# Altium PCB SPI-光电.PCBDOC
Units mm, origin at the board's own origin, x right, y up, seen from the top; angles counter-clockwise.
Board outline 85.45 x 30.8 mm, 2 copper layers (Top Layer, Bottom Layer); 28 components, 14 nets, 71 pads, 34 vias.
Unrouted connection lines stored in the file: 5.
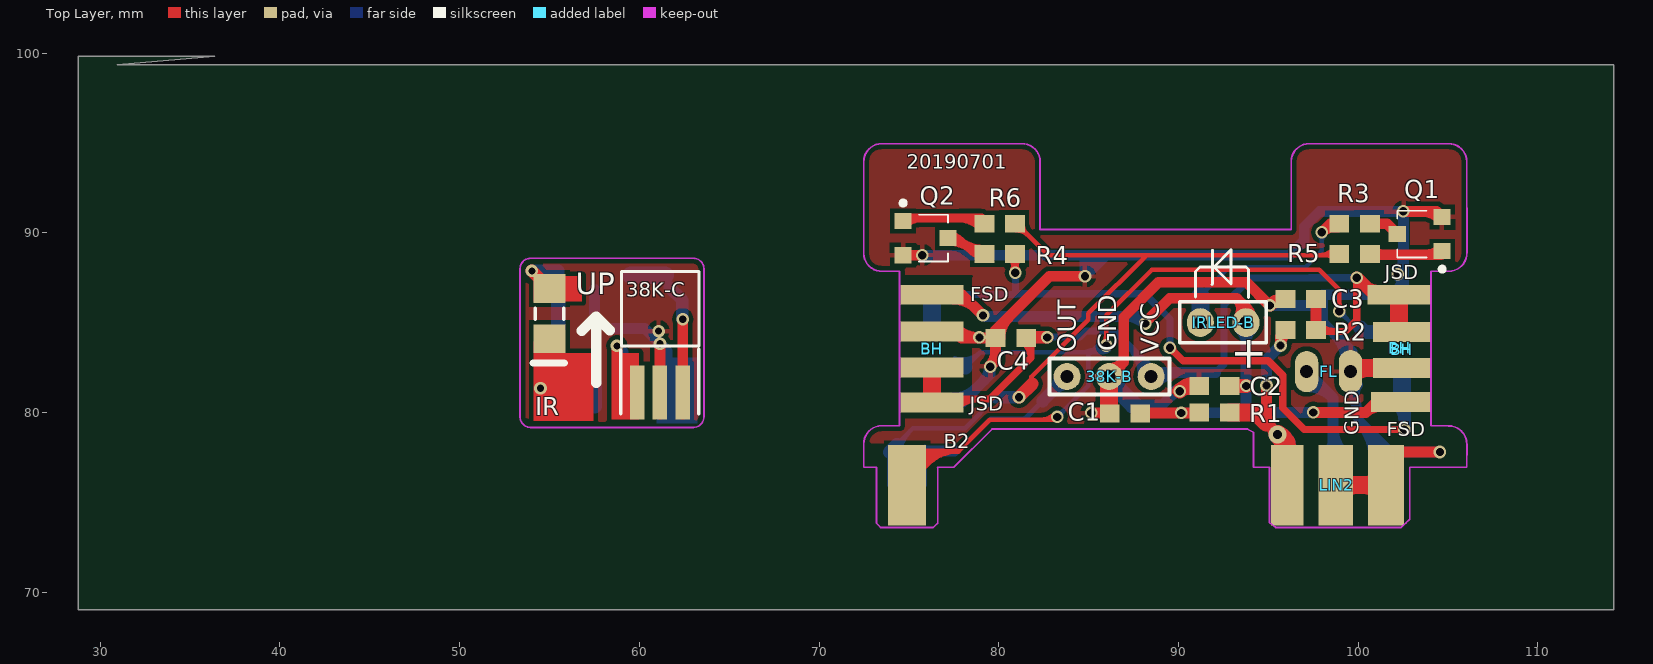
[diagram p0: Top Layer view]
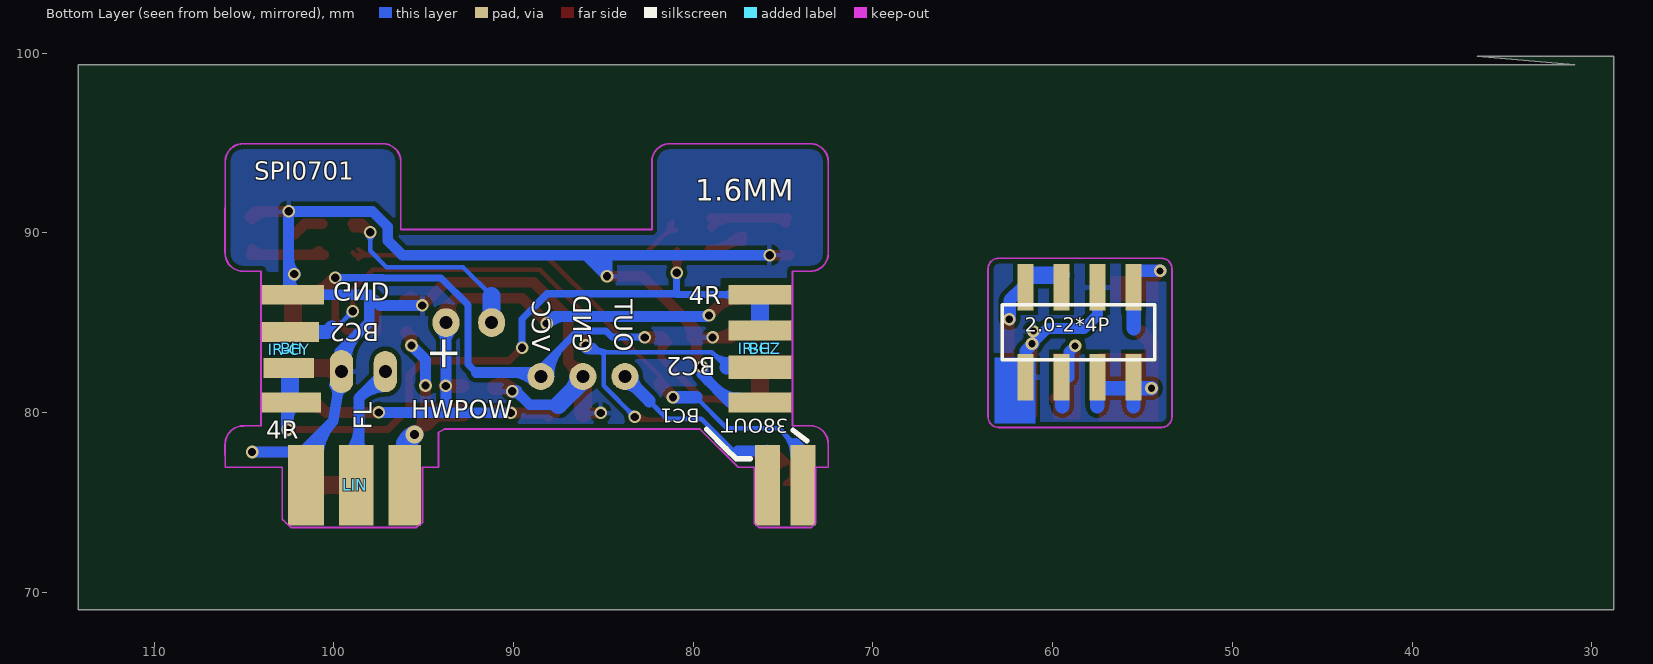
[diagram p1: Bottom Layer view, seen from below]

## Layer stack, top to bottom
Top Layer: signal copper 0.0356
Dielectric: dielectric 0.32, FR-4, Dk 4.8
Bottom Layer: signal copper 0.0356

## Board outline
30.95,99.35 114.225,99.35 114.225,69.025 28.775,69.025 28.775,99.825 36.375,99.825

## Design rules (kind name [scope] priority, off if disabled: settings)
Clearance [All] p1: gap=0.254
FabricationTestPointUsage TestPointUsage [All] p1: valid=0 allowmultiple=FALSE
FabricationTestpoint Testpoint [All] p1: side=3 testpointundercomponent=TRUE minsize=1.016 maxsize=2.54 preferedsize=1.524 minholesize=0 maxholesize=1.016 preferedholesize=0.813 testpointgrid=0.025 allowsidetop=TRUE allowsidebottom=TRUE usegrid=TRUE gridtolerance=0
PolygonConnect [All] p1: connectstyle=Relief reliefconductorwidth=0.254 reliefentries=4 polygonreliefangle="90 Angle"
RoutingVias [All] p1: holewidth=0.46 width=0.7 viastyle="Through Hole" minholewidth=0.4 minwidth=0.7 maxholewidth=1 maxwidth=2
SilkscreenOverComponentPads [All] p1: minsilkscreentomaskgap=0.254
SolderMaskExpansion [All] p1: expansion=0.102
Width Width_6 [InNet('Net1C_1')] p1: maxlimit=1 minlimit=0.254 preferedwidth=0.6 minimp=50.000000 maximp=50.000000 favimp=50.000000
Width Width_5 [InNet('FL')] p2: maxlimit=1 minlimit=0.254 preferedwidth=0.6 minimp=50.000000 maximp=50.000000 favimp=50.000000
Width Width_4 [InNet('GND')] p3: maxlimit=2 minlimit=0.254 preferedwidth=0.6 minimp=50.000000 maximp=50.000000 favimp=50.000000
Width Width_3 [InNet('5V')] p4: maxlimit=1 minlimit=0.254 preferedwidth=0.6 toplayer_prefwidth=0.4 minimp=50.000000 maximp=50.000000 favimp=50.000000
Width Width_2 [InNet('3V3')] p5: maxlimit=1 minlimit=0.254 preferedwidth=0.6 minimp=50.000000 maximp=50.000000 favimp=50.000000
Width Width_1 [InNet('3.3V')] p6: maxlimit=1 minlimit=0.254 preferedwidth=0.6 minimp=50.000000 maximp=50.000000 favimp=50.000000
Width [All] p7: maxlimit=1 minlimit=0.254 preferedwidth=0.254 minimp=50.000000 maximp=50.000000 favimp=50.000000
25 further rules are at their usual default settings.

## Components (designator, comment, footprint, x,y, rotation, side; value= is the part's Value field where it differs from the comment)
2.0-2*4P "ZY2.0*4P" MHDR2X4 60.775,83.825 r180 bottom locked
38K-B "LF0038Q" HDR1X3 83.6,82 r0 top locked
38K-C "LF0038L  1.27*3" MHDR1X3#1 59.875,81.1 r0 top
BH "" HDR1X2#1 76.625,82.015 r90 bottom
BH "" HDR1X2#2 102.375,82.015 r90 bottom locked
BH "" HDR1X2#1 76.625,85.095 r270 top
BH "" HDR1X2#3 75.95,85.044 r270 top
BH "" HDR1X2#4 102.525,85.019 r270 top locked
BH "" HDR1X2#5 102.533,85.095 r270 top locked
C1 "10uf" CR1608-0603 87.025,79.95 r180 top (schematic designator R6)
C2 "0.01uf" CR1608-0603 92,81.475 r180 top (schematic designator R6)
C3 "0.01uf" CR1608-0603 96.8,86.325 r0 top (schematic designator R6)
C4 "0.1uf" CR1608-0603 80.675,84.15 r180 top (schematic designator R6)
FL "2.54" HDR1X2#6 99.673,82.275 r180 top locked
IR "940-C IR26-21C/L110" CR3216-1206 55,85.5 r270 top locked
IR-CY "PH2.0-2*4" HDR1X2#7 102.575,85.019 r270 bottom (schematic designator BH)
IR-CZ "PH2.0-2*4" HDR1X2#8 76.435,85.019 r270 bottom (schematic designator BH)
IRLED-B "940-B TSAL6200" HDR1X2#9 91.217,85 r0 top locked
LIN "HWPOW  FL GND" MHDR1X3#2 97.315,75.875 r0 bottom
LIN2 "HWPOW  GND  GND" MHDR1X3#3 97.315,75.875 r0 top
Q1 "S8050" SO-G3/C2.5 103.425,89.925 r90 top (schematic designator U4)
Q2 "S8050" SO-G3/C2.5 75.925,89.7 r270 top (schematic designator U4)
R1 "100" CR1608-0603 92,80 r0 top (schematic designator R6)
R2 "100" CR1608-0603 96.8,84.6 r180 top (schematic designator R6)
R3 "1K" CR1608-0603 99.8,90.5 r180 top (schematic designator 2R)
R4 "470" CR1608-0603 80.05,88.825 r0 top (schematic designator 4R)
R5 "4.7K" CR1608-0603 99.8,88.825 r0 top (schematic designator 1R)
R6 "4.7K" CR1608-0603 80.05,90.5 r0 top (schematic designator 3R)

## Footprints (in the part's own frame and the unit in brackets; to place one, negate y for a bottom-side part, rotate by r counter-clockwise, add the part's x,y. Pads: shape width x height; smd on the part's side, far side on the other; paste and mask are expansions set on the pad)
CR1608-0603 [mm] "C"
  rect 1.1x1 smd: 1(-0.85,0) 2(0.85,0)
CR3216-1206 [mm] "Chip Resistor; Body 3.2 x 1.6 mm (LxW typ)"
  rect 1.6x1.8 smd: 1(-1.4,0) 2(1.4,0)
  silkscreen extent -0.3,-0.8 0.3,0.8
HDR1X2#1 [mm]
  rect 1.1x3.5 smd: 1(-1.46,-0.35) 2(4.54,-0.35)
HDR1X2#2 [mm]
  rect 1.1x3.3 smd: 1(-1.46,0)
  rect 1.1x3.5 smd: 2(4.54,-0.09)
HDR1X2#3 [mm]
  rect 1.1x3.5 smd: 1(0.54,0.325) 2(2.54,0.325)
HDR1X2#4 [mm]
  rect 1.1x3.2 smd: 1(0.54,-0.09) 2(2.54,-0.09)
HDR1X2#5 [mm]
  rect 1.1x3.5 smd: 1(-1.46,-0.258)
  rect 1.1x3.3 smd: 2(4.52,-0.158)
HDR1X2#6 [mm] "Connector; Header; 2 Position"
  oval 1.3x2.4 hole 0.72: 1(0.1,0)
  oval 1.3x2.3 hole 0.72: 2(2.54,0)
HDR1X2#7 [mm]
  rect 1.1x3.2 smd: 1(0.54,0.14)
  rect 1.1x2.8 smd: 2(2.54,0.075)
HDR1X2#8 [mm]
  rect 1.1x3.5 smd: 1(0.464,0.14)
  rect 1.3x3.5 smd: 2(2.494,0.142)
HDR1X2#9 [mm] "Connector; Header; 2 Position"
  oval 1.5x1.6 hole 0.72: 1(0,0) 2(2.54,0)
  silkscreen extent -1.14,-1.12 3.66,1.15
HDR1X3 [mm] "Connector; Header; 3 Position"
  round 1.5 hole 0.72: 1(0.2,0) 2(2.54,0) 3(4.882,0)
  silkscreen extent -0.77,-1 5.9,1
MHDR1X3#1 [mm] "Connector; Header; 3 Position"
  rect 0.8x3 smd: 1(0,0) 2(1.27,0) 3(2.54,0)
  silkscreen extent -0.9,-1.17 3.44,2.43
MHDR1X3#2 [mm]
  rect 1.8x4.5 smd: 1(-1.262,-0.075)
  rect 1.9x4.5 smd: 2(1.438,-0.075)
  rect 2x4.5 smd: 3(4.235,-0.075)
MHDR1X3#3 [mm]
  rect 1.8x4.5 smd: 1(-1.262,0.075)
  rect 1.9x4.5 smd: 2(1.438,0.075)
  rect 2x4.5 smd: 3(4.235,0.075)
MHDR2X4 [mm] "Connector; Header; 4x2 Position"
  rect 0.9x2.6 smd: 1(-0.73,-1.865) 2(-0.73,3.135) 3(1.27,-1.865) 4(1.27,3.135) 5(3.27,-1.865) 6(3.27,3.135) 7(5.27,-1.865) 8(5.27,3.135)
  silkscreen extent -2.03,-0.9 6.45,2.17
SO-G3/C2.5 [mm] "SOT-23; 3 Lead"
  rect 0.9x0.95 smd: 1(-0.95,-1.25) 2(0.95,-1.25) 3(0,1.25)
  silkscreen extent -2.07,-1.38 1.3,1.25

## Part data
BH BH BH BH BH BH IR-CY IR-CZ: library part "Header 2", "Heade"
C1 C2 C3 C4 R1 R2 R3 R4 R5 R6: library part Res3, "Resistor"
Q1 Q2: library part QNPN, "NPN Bipolar Transistor"

## Free pads (board coordinates)
  rect 1.4x4.5 smd far side: 0(73.895,75.95) 0(75.875,75.95)
  rect 2.1x4.5 smd: 0(74.9,75.95)

## Via types
v1: diameter 0.7, hole 0.46, Top Layer to Bottom Layer, 27 vias
v2: diameter 0.7, hole 0.4, Top Layer to Bottom Layer, tented both sides, 5 vias
v3: diameter 1, hole 0.5, Top Layer to Bottom Layer, 1 vias
v4: diameter 0.7, hole 0.4, Top Layer to Bottom Layer, tented bottom, 1 vias

## Nets (pads, with @x,y where several pads share a name; then routed paths per layer and width w, separated by ;. In a path a pad name is that pad's centre, name@x,y a point inside that pad or via, vN(x,y) a via of type N, cw(c..) or ccw(c..) an arc to the next point about the centre after c; other vN are vias at no path point)
1Q-B: Q1.1 R5.2 | length 5.4
  Top Layer w0.6: R5.2@100.575,88.775 Q1.1@104.6,88.775 ; R5.2@100.841,88.966 ccw(c101.304,89.429) 101.304,88.775 ; 103.805,88.775 ccw(c103.805,89.82) Q1.1@104.544,89.081
1Q-C: Q1.3 R3.1 | length 1.8
  Top Layer w0.6: R3.1 101.6,90.5 Q1.3
2Q-B: Q2.1 R6.1 | length 6.5
  Top Layer w0.5: Q2.1@74.75,90.825 R6.1@79.05,90.825 ; Q2.1@74.841,90.509 cw(c75.605,89.745) 75.605,90.825 ; 77.762,90.825 cw(c77.762,89.112) R6.1@78.973,90.323
2Q-C: Q2.3 R4.1 | length 8.1
  Top Layer w0.4: Q2.3 77.75,89.7 ; Q2.3@77.188,89.85 cw(c77.256,89.027) 77.84,89.61 ; Q2.3@77.221,89.451 cw(c77.349,87.899) 78.45,89 ; Q2.3@77.388,89.536 cw(c77.75,89.22) 77.75,89.7 ; Q2.3@77.388,89.864 ccw(c77.75,90.18) 77.75,89.7 ; 77.75,89.7 ccw(c79.138,91.088) R4.1@79.148,89.125 ; 78.428,89.022 ccw(c79.145,89.739) R4.1@79.151,88.725 ; R4.1@78.871,88.714 ccw(c78.45,88.547) 78.45,89 ; R4.1@79.2,89 78.45,89 ; 77.75,89.7 78.45,89
2R: IRLED-B.1 R3.2 | length 13.3
  Top Layer w0.6: R3.2@98.864,90.303 ccw(c98.685,89.315) v1(97.975,90.025) 98.45,90.5 R3.2
  Bottom Layer w0.254: 91.216,86.491 92.794,88.069 97.044,88.069 97.975,89 v1(97.975,90.025) ; v1@97.817,89.867 cw(c97.437,89.487) 97.975,89.487 cw(c98.513,89.487) v1@98.133,89.867
  Bottom Layer w1: IRLED-B.1 91.216,86.491
4R: 2.0-2*4P.5 2.0-2*4P.7 BH.1@102.375,80.555 BH.2@76.275,86.555 IR-CY.2 IR-CZ.1 IR.2 R4.2 | length 56.7
  Top Layer w0.4: R4.2@80.688,88.613 cw(c80.115,88.04) v1@80.925,88.04 ; v1@80.795,87.85 ccw(c80.278,88.148) 80.855,88.303 ; v1@80.819,87.881 ccw(c80.563,88.137) 80.925,88.137 ccw(c81.287,88.137) v1@81.031,87.881 ; R4.2 81.1,88.8 R4.2@80.925,88.975 ; R4.2@80.9,89 R4.2@80.925,88.975 ; v1(80.925,87.775) R4.2@80.925,88.975 ; 80.925,88.161 cw(c81.564,88.161) R4.2@81.112,88.613 ; v1@89.525,83.45 cw(c89.525,83.088) 89.781,83.344 cw(c90.037,83.6) v1@89.675,83.6 ; v1(89.525,83.6) 90.25,82.875 95,82.875 95.8,82.075 95.8,80.25 97,79.05 v1(102.562,79.05) ; v1@102.456,78.944 ccw(c102.2,78.688) 102.2,79.05 ccw(c102.2,79.412) v1@102.456,79.156
  Top Layer w0.8: v2(54.5,81.35) 54.5,83.85 IR.2@55.075,84.425
  Bottom Layer w0.254: IR-CZ.1@76.275,84.575 IR-CZ.1 ; BH.2@76.275,86.555 BH.2@77.425,86.555 ; BH.1@102.433,80.613 102.375,80.555 102.592,80.555 BH.1@103.429,80.555
  Bottom Layer w0.4: BH.2@77.425,86.555 80.925,86.555 v1(80.925,87.775) ; BH.2@77.722,86.308 cw(c78.32,85.71) 78.32,86.555 cw(c78.32,87.4) BH.2@77.722,86.803 ; v1@80.819,87.669 cw(c80.563,87.413) 80.925,87.413 cw(c81.287,87.413) v1@81.031,87.669 ; 80.925,86.605 88.12,86.605 89.525,85.2 v1(89.525,83.6) ; v1@89.419,83.706 ccw(c89.163,83.962) 89.525,83.962 ccw(c89.887,83.962) v1@89.631,83.706
  Bottom Layer w0.7: BH.1@102.234,80.414 cw(c101.369,79.549) 102.592,79.549 ; v1@102.592,79.021 BH.1@102.592,80.555
  Bottom Layer w0.8: v2(54.5,81.35) 2.0-2*4P.5@57.375,81.35 ; 55.5,80.35 2.0-2*4P.7@55.5,81.96 ; 57.515,80.35 2.0-2*4P.5@57.515,81.6
  Bottom Layer w1: IR-CZ.1@76.275,84.575 BH.2@76.275,86.555 ; BH.1@102.433,80.613 IR-CY.2@102.433,82.479
38BC1: 38K-B.1 pad.0@75.875,75.95 | length 17.4
  Bottom Layer w0.254: pad.0@75.875,75.95 pad.0@75.875,78.08 ; 77.75,77.85 79.55,79.65 81.45,79.65
  Bottom Layer w0.3: 77.52,77.85 77.75,77.85 ; 81.45,79.65 38K-B.1@83.784,81.984 ; 38K-B.1@83.2,82 cw(c81.751,82) 82.776,80.976 cw(c83.8,79.951) 38K-B.1@83.8,81.4
  Bottom Layer w0.6: pad.0@75.975,77.85 77.52,77.85
  Bottom Layer w0.7: 82.437,80.638 38K-B.1 ; 38K-B.1@83.4,82 cw(c82.434,82) 83.117,81.317 cw(c83.8,80.634) 38K-B.1@83.8,81.6
38BC2: 2.0-2*4P.3 38K-C.1 IR-CY.1 IR-CZ.2 pad.0@74.9,75.95 | length 80.1
  Top Layer w0.254: pad.0@74.125,78.003 74.125,76.022 pad.0@74.9,76.022 ; pad.0@74.9,76.025 74.548,76.377 74.548,77.073 pad.0@75.325,77.85 ; 77.75,77.85 79.5,79.6 83.096,79.6 v1@83.25,79.754 ; 82.35,79.6 ccw(c82.35,80.65) v1@83.092,79.908 ; v1@85.817,83.883 ccw(c85.437,84.263) 85.975,84.263 ccw(c86.513,84.263) v1@86.133,83.883 ; v1(85.975,83.725) 85.975,85.4 88.525,87.95 97.825,87.95 98.95,86.825 v1(98.95,85.625) ; v1@98.792,85.783 ccw(c98.412,86.163) 98.95,86.163 ccw(c99.488,86.163) v1@99.108,85.783
  Top Layer w0.3: pad.0@74.9,77.15 cw(c76.147,76.39) 76.147,77.85 ; pad.0@75.156,76.994 cw(c76.681,76.064) 76.681,77.85 ; pad.0@75.325,77.85 77.75,77.85 ccw(c77.75,75.412) pad.0@75.668,76.681 ; pad.0@75.412,76.838 cw(c77.216,75.738) 77.216,77.85
  Top Layer w0.6: v2(58.75,83.7) 58.75,81.65 59.626,80.774 38K-C.1@59.875,80.774
  Bottom Layer w0.254: IR-CZ.2@77.316,82.299 ccw(c77.564,83.028) 78.108,82.483 ; IR-CZ.2@77.398,82.539 ccw(c77.71,83.459) 78.397,82.772 ; IR-CZ.2@77.479,82.78 ccw(c77.857,83.891) 78.686,83.061 ; IR-CZ.2@77.561,83.02 ccw(c78.003,84.322) 78.975,83.35 ; 78.15,82.525 78.975,83.35 ; v1(83.25,79.75) 84.988,81.488 84.988,83.213 ; v1@83.25,79.973 ccw(c83.25,80.511) 83.631,80.131 ccw(c84.011,79.75) v1@83.473,79.75 ; 84.531,83.35 ccw(c84.531,85.169) v1@85.817,83.883 ; 85.145,83.35 ccw(c85.145,84.555) v1@85.997,83.703 ; 85.329,83.554 cw(c85.846,83.037) v1@85.981,83.755 ; 85.758,83.35 ccw(c85.758,83.942) v1@86.177,83.523 ; v1@85.803,83.583 ccw(c85.5,83.331) 85.5,83.725 ; v1@85.803,83.867 cw(c85.5,84.119) 85.5,83.725 ; v1@85.807,83.578 cw(c85.682,83.468) 85.8,83.35 ; v1@85.934,83.506 ccw(c85.738,82.464) 84.988,83.213 ; v1(85.975,83.725) 85.5,83.725 ; v1@86.225,83.775 85.8,83.35 ; v1@98.95,85.402 cw(c98.95,84.864) 99.331,85.244 cw(c99.711,85.625) v1@99.173,85.625 ; v1(98.95,85.625) 99.85,84.725 100.125,84.725 ; 78.975,83.35 85.8,83.35 ; 84.988,83.213 85.5,83.725
  Bottom Layer w0.6: v2(58.75,83.7) 59.09,83.36 2.0-2*4P.3@59.09,81.96
  Bottom Layer w0.8: 59.465,80.35 2.0-2*4P.3@59.465,81.6 ; IR-CZ.2 78.15,82.525 ; 100.125,84.725 100.371,84.479 IR-CY.1
38OUT: pad.0@73.895,75.95 R5.1 R6.2 | length 49.6
  Top Layer w0.254: R6.2@80.95,90.127 cw(c80.95,89.106) 81.672,89.828 ; v1(81.125,80.848) 81.8,81.523 81.8,81.975 84.988,85.163 84.988,85.513 88.225,88.75 ; v1@81.125,81.071 ccw(c81.125,81.61) 81.506,81.229 ccw(c81.886,80.848) v1@81.348,80.848 ; R6.2@81.175,90.65 81.175,90.325 82.75,88.75 98.8,88.75 R5.1@98.95,88.9 ; R6.2@81.323,90.5 ccw(c82.103,90.5) 81.551,89.949 ; 97.818,88.75 ccw(c97.818,89.907) R5.1@98.636,89.089 ; 98.181,88.75 cw(c98.181,88.106) R5.1@98.636,88.561
  Top Layer w0.7: v1(81.125,80.848) 81.863,81.587
  Bottom Layer w0.254: pad.0@73.895,75.95 pad.0@73.895,77.795 ; pad.0@73.895,78.073 ccw(c73.895,78.744) 74.37,78.27 ; pad.0@73.915,78.073 ccw(c73.935,78.644) 74.34,78.24 ; pad.0@74.214,77.5 cw(c75.696,77.5) 74.648,78.548 ; pad.0@74.327,77.876 cw(c74.528,78.051) 74.34,78.24 ; pad.0@74.468,77.5 cw(c76.563,77.5) 75.082,78.982 ; 79.848,80.848 78.129,79.129 75.229,79.129 74.34,78.24
  Bottom Layer w0.7: pad.0@73.895,77.795 74.34,78.24 ccw(c74.734,77.846) pad.0@74.219,77.633 ; 79.848,80.848 v1(81.125,80.848)
FL: FL.2 LIN.2 | length 11.1
  Bottom Layer w0.6: FL.2@97.133,81.425 cw(c97.133,79.373) 98.584,80.824 ; FL.2 98.6,80.808 98.6,76.203 LIN.2@98.853,75.95 ; LIN.2@98.293,77.71 ccw(c97.553,78.45) 98.6,78.45 ; 98.6,79.189 ccw(c100.692,79.189) LIN.2@99.213,77.71
FS-D: 2.0-2*4P.8 BH.1@76.275,86.555 BH.2@102.375,80.575 C1.1 C2.1 IR.1 IRLED-B.2 R1.1 | length 63.7
  Top Layer w0.6: IR.1@54.8,86.475 IR.1@54.8,86.5 ; BH.1@77.475,86.305 cw(c77.475,84.506) 78.747,85.778 ; BH.1@77.588,86.447 BH.1@77.479,86.555 ; v1(79.125,85.4) 77.97,86.555 BH.1@77.745,86.555 ; C1.1@87.7,79.975 R1.1@91.4,79.975 ; C1.1@88.066,79.809 cw(c88.468,79.407) 88.468,79.975 ; v1(88.15,84.95) 88.15,85 89.51,86.36 93.248,86.36 ; 90.557,79.975 ccw(c90.557,80.543) R1.1@90.959,80.141 ; IRLED-B.2@93.374,85.286 ccw(c92.633,85.744) 93.249,86.36 ; IRLED-B.2@93.522,85.434 ccw(c93.267,85.852) 93.756,85.852 ; IRLED-B.2 93.756,85.852 ; 93.785,85.824 cw(c93.296,85.335) IRLED-B.2@93.884,84.971 ; IRLED-B.2@93.991,85.434 cw(c94.246,85.852) 93.756,85.852 ; v1(97.5,80) 100.425,80 ; BH.2@101.264,80.325 ccw(c101.213,79.212) 100.425,80 ; BH.2@102.375,80.575 101,80.575 100.425,80 ; BH.1@77.479,86.555 BH.1@77.745,86.555 ; BH.1@77.479,86.555 76.275,86.555 BH.1@77.745,86.555 ; 93.248,86.36 93.756,85.852
  Top Layer w0.7: v4(54.025,87.875) IR.1@55.075,86.825
  Top Layer w0.8: C2.1 v1(93.775,81.475)
  Bottom Layer w0.6: v1@79.154,85.429 79.237,85.346 87.754,85.346 v1(88.15,84.95) ; 87.073,85.346 cw(c87.073,83.873) v1@88.115,84.915 ; v1(90.15,79.975) 90.154,79.979 97.479,79.979 v1(97.5,80) 93.756,80 IRLED-B.2 ; IRLED-B.2@93.438,84.632 cw(c92.67,83.864) 93.756,83.864 cw(c94.843,83.864) IRLED-B.2@94.075,84.632
  Bottom Layer w0.7: v4(54.025,87.875) 55.49,87.875 55.49,85.4
  Bottom Layer w0.8: 55.49,84.675 2.0-2*4P.8@55.49,86.45
GND: 2.0-2*4P.1 2.0-2*4P.6 38K-B.2 38K-C.2 BH.1@76.275,80.555 BH.1@76.275,84.504 BH.2@102.285,86.555 BH.2@102.435,82.479 C1.2 C2.2 C3.1 C4.2 FL.1 LIN2.2 LIN2.3 LIN.3 Q1.2 Q2.2 | length 157.4
  Top Layer w0.6: 38K-C.2@61.145,79.9 v2@61.145,83.825 ; Q2.2 v1(75.75,88.75) ; BH.1@76.275,84.504 77.571,84.504 77.925,84.15 C4.2 ; BH.1@77.652,84.681 ccw(c78.933,85.962) v1@78.933,84.15 ; v1@79.49,82.585 ccw(c78.68,83.395) 79.825,83.395 ; v1(79.525,82.55) 79.825,82.85 79.825,84.575 82.825,87.575 v1(84.8,87.575) ; C4.2@80.075,84.15 cw(c81.705,84.15) 80.552,85.302 ; v1(85.15,79.975) 86.14,79.975 86.15,79.975 C1.2 ; 85.582,79.975 cw(c85.582,79.407) C1.2@85.984,79.809 ; 38K-B.2 86.95,82.81 86.95,85.3 88.894,87.244 93.782,87.244 v1(95.072,85.954) ; 38K-B.2@86.14,82.45 ccw(c86.14,83.536) 86.908,82.768 ccw(c87.676,82) 38K-B.2@86.59,82 ; C2.2@91.05,81.375 C2.2 ; v1@95.108,85.918 cw(c95.848,85.178) C3.1@95.848,86.225 ; C3.1@95.733,86.435 cw(c95.344,86.691) 95.344,86.225 ; C3.1@95.837,86.135 ccw(c95.602,85.424) v1(95.072,85.954) ; C3.1@96.075,86.225 95.344,86.225 ; FL.1@99.673,82.275 FL.1@99.877,82.479 ; LIN2.3@101.753,75.95 101.753,77.8 v1(104.546,77.8) ; v1(102.514,91.189) 104.361,91.189 Q1.2 ; 103.529,91.189 cw(c103.529,89.754) Q1.2@104.544,90.769 ; v1(95.072,85.954) 95.344,86.225 ; v1@95.116,85.929 cw(c95.787,85.541) 95.587,86.29 ccw(c95.787,85.541) v1@95.116,85.929
  Top Layer w0.8: v1@90.04,81.21 cw(c90.437,80.813) 90.437,81.375 ; C2.2@91.034,81.4 ccw(c90.668,80.982) v1@90.275,81.375 ; C2.2@91.05,81.375 v1@90.275,81.375 ; C2.2@91.064,81.382 ccw(c90.727,80.523) v1(90.075,81.175) v1@90.275,81.375
  Top Layer w1: C1.2@86.14,79.975 38K-B.2 ; LIN2.2@98.853,75.95 LIN2.3@101.753,75.95 ; LIN2.2@99.071,75.632 cw(c99.839,74.864) 99.839,75.95 cw(c99.839,77.036) LIN2.2@99.071,76.268 ; FL.1@99.779,82.169 cw(c100.528,81.42) 100.528,82.479 ; FL.1@99.877,82.479 BH.2@102.435,82.479 ; LIN2.3@101.196,75.596 ccw(c100.343,74.743) 100.343,75.95 ccw(c100.343,77.157) LIN2.3@101.196,76.304
  Bottom Layer w0.6: 2.0-2*4P.6@57.5,86.85 57.5,85.425 58.25,84.675 60.3,84.675 61.09,83.885 v2@61.09,83.825 ; v1(75.75,88.75) 84.775,88.75 ; BH.1@76.275,80.555 77.955,80.555 79.525,82.125 v1(79.525,82.55) ; BH.1@77.475,80.805 ccw(c77.475,82.568) 78.721,81.321 ; 79.139,81.739 ccw(c78.328,82.55) v1@79.475,82.55 ; 85,88.375 85,88.525 85.225,88.75 ; 38K-B.2@86.14,81.785 38K-B.2 ; 87.5,80.425 89.1,80.425 v1@89.85,81.175 ; 89.606,80.931 cw(c90.075,80.461) v1@90.075,81.125 ; v1(95.072,85.954) 97.423,85.954 98.025,86.555 ; 98.685,84.365 cw(c97.145,82.825) FL.1@99.323,82.825 ; FL.1@99.469,81.441 cw(c98.977,80.759) 99.807,80.894 ; 99.808,80.888 cw(c100.646,81.024) FL.1@99.957,81.521 ; LIN.3@100.853,77.261 ccw(c98.02,77.511) 100.031,79.522 ; BH.2@100.908,86.378 ccw(c100.481,85.952) 100.481,86.555 ccw(c100.481,87.159) BH.2@100.908,86.732 ; 100.94,78.613 cw(c99.691,77.364) LIN.3@101.45,77.209 ; LIN.3@101.753,75.95 LIN.3@101.753,77.8 ; BH.2@102.108,86.732 ccw(c101.129,87.712) v1@102.514,87.712 ; v1@102.165,87.665 cw(c101.321,86.821) BH.2@102.514,86.821 ; v1@102.165,87.735 ccw(c101.321,88.579) 102.514,88.579 ; v1(104.546,77.8) LIN.3@101.753,77.8 ; 84.775,88.75 85.225,88.75 ; 84.775,88.75 84.8,88.725 v1(84.8,87.575) 85.975,88.75 ; 85.225,88.75 85.975,88.75 ; 85.975,88.75 96.184,88.75 97,89.566 97,90.328 97.861,91.189 v1(102.514,91.189) 102.514,86.555 102.285,86.555 98.025,86.555 ; 98.025,86.555 98.025,85.025 99.673,83.377 99.673,81.717 100.031,79.522 ; 100.031,79.522 LIN.3@101.752,77.8
  Bottom Layer w0.7: v2@61.09,83.825 61.505,83.41 2.0-2*4P.1 ; v1@89.85,81.175 v1(90.075,81.175)
  Bottom Layer w0.8: 61.515,79.825 2.0-2*4P.1@61.515,81.6
  Bottom Layer w1: 38K-B.2@86.14,81.785 87.5,80.425 ; 38K-B.2@86.39,82 ccw(c87.513,82) 86.719,81.206
  other v1: 78.925,84.175 102.2,87.7
  other v2: 61.15,83.825 61.075,84.525
HWPOW: LIN2.1 LIN.1 R1.2 R2.2 | length 30.2
  Top Layer w0.6: v1(94.9,81.5) 94.9,79.45 v3@95.537,78.813 ; 95.106,79.244 cw(c94.636,78.775) v3@95.3,78.775 ; v1@95.675,83.697 cw(c96.648,83.697) R2.2@96.028,84.446 ; v1(95.675,83.725) 95.675,84.225 95.95,84.5 ccw(c96.54,83.91) v1@95.724,83.735 ; LIN2.1@96.025,78 LIN2.1
  Top Layer w1: R1.2 94.35,80 94.9,79.45 ; LIN2.1@95.707,77.501 ccw(c94.772,78.047) 95.538,78.812 96.025,78.325 ; LIN2.1@96.025,77.05 96.025,78 96.025,78.325 ; LIN2.1@96.025,77.508 ccw(c94.233,77.508) v3(95.5,78.775) ; LIN2.1@96.025,78.084 ccw(c95.307,78.084) v3(95.5,78.775) ; LIN2.1@96.334,77.584 cw(c97.066,78.325) 96.025,78.325 ; v3(95.5,78.775) cw(c94.928,77.839) 96.025,77.839 ccw(c94.928,77.839) v3(95.5,78.775)
  Bottom Layer w0.6: v1(94.9,81.5) 94.9,82.95 v1(95.675,83.725)
  Bottom Layer w0.8: v3(95.5,78.775) v3@95.5,78.825 ; LIN.1@95.633,77.571 ccw(c94.791,78.116) v3@95.5,78.825 ; 96.053,78.272 v3@95.5,78.825
  Bottom Layer w1: LIN.1@95.77,77.583 ccw(c95.087,78.266) 96.053,78.266 ccw(c97.019,78.266) LIN.1@96.336,77.583 ; LIN.1 96.053,78.272 ; LIN.1@96.053,77.44 ccw(c94.165,77.44) v3(95.5,78.775) cw(c95.271,78.027) LIN.1@96.053,78.027
JS-D: 2.0-2*4P.2 2.0-2*4P.4 38K-B.3 38K-C.3 BH.1@102.275,86.555 BH.1@102.435,84.479 BH.2@76.275,80.555 BH.2@76.275,82.504 C3.2 C4.1 R2.1 | length 64.2
  Top Layer w0.254: BH.1@100.87,86.555 BH.1@102.275,86.555 ; BH.1@102.275,84.639 BH.1@102.435,84.479
  Top Layer w0.4: BH.2@76.275,80.555 76.47,80.75 79.5,80.75 81.8,83.05 C4.1@81.8,84.175 ; BH.2@77.722,80.307 cw(c78.791,79.239) 78.791,80.75 ; C4.1@81.383,83.92 cw(c80.637,83.027) 81.8,83.027 ; C4.1 C4.1@81.55,84.175 ; R2.1@97.65,84.5 99.3,84.5 99.925,85.125 v1(99.925,87.5) ; R2.1@97.912,84.812 ccw(c98.666,85.566) 98.666,84.5 ; v1@99.819,87.394 cw(c99.563,87.138) 99.925,87.138 cw(c100.287,87.138) v1@100.031,87.394
  Top Layer w0.6: 38K-C.3@62.415,79.9 v2(62.415,85.19) ; R2.1@97.65,84.5 C3.2@97.65,86.225
  Top Layer w0.7: C4.1@81.8,84.175 v1(82.7,84.175) ; v1(99.925,87.5) BH.1@100.87,86.555 ; 100.384,87.041 ccw(c101.075,87.733) BH.1@101.075,86.755
  Top Layer w1: BH.2@76.275,80.555 BH.2@76.275,82.504 ; BH.1@102.275,84.639 BH.1@102.275,86.555
  Bottom Layer w0.254: v1@99.775,87.5 v1@99.925,87.65
  Bottom Layer w0.4: v1(82.7,84.175) 82.725,84.2 84.525,84.2 84.854,84.529 86.421,84.529 88.482,82.468 38K-B.3 38K-B.3@88.707,82.225 ; v1@82.806,84.069 cw(c83.122,83.753) 83.122,84.2 ; 87.212,83.738 cw(c85.474,82) 38K-B.3@87.932,82 ; 87.895,83.055 cw(c86.84,82) 38K-B.3@88.332,82 ; 92.075,82.225 92.525,82.675 92.525,85.975 94.038,87.488 97.285,87.488 97.297,87.5 v1@99.775,87.5 ; v1@99.819,87.394 ccw(c99.563,87.138) 99.563,87.5 ccw(c99.563,87.862) v1@99.819,87.606
  Bottom Layer w0.6: 38K-B.3@88.707,82.225 92.075,82.225 ; 38K-B.3@88.8,81.682 cw(c90.112,80.37) 90.112,82.225
  Bottom Layer w0.7: 2.0-2*4P.2@61.69,86.96 62.4,86.25 v2@62.4,85.19
  Bottom Layer w1: 2.0-2*4P.4@59.525,87.635 2.0-2*4P.2@61.43,87.635

## Polygon pours and split planes (outlines as drawn)
GND on Bottom Layer "Top Layer-No Net" (solid, remove dead copper, pour order 10): 53.375,88.065 53.375,88.354 53.599,88.578 53.62,88.599 53.706,88.599 54.029,88.599 54.05,88.621 54.098,88.573 62.953,88.573 63.301,88.573 63.426,88.449 63.526,88.349 63.526,88.082 63.526,79.596 63.523,79.593 63.405,79.475 63.405,79.169 63.108,79.169 63.039,79.1 53.856,79.1 53.723,79.233 53.513,79.233 53.513,79.452 53.375,79.59 53.375,88.065
GND on Bottom Layer "Top Layer-No Net" (solid, remove dead copper, pour order 6): 72.485,78.237 79.325,78.237 79.45,78.362 80.15,79.062 80.175,79.062 93.847,79.062 94.024,78.885 94.175,78.885 94.175,78.512 94.45,78.237 106.046,78.237 106.046,78.691 105.675,79.062 105.495,79.242 104.85,79.242 104.046,79.242 103.726,79.562 100.375,79.562 100.375,87.662 100.35,87.687 100.5,87.837 104.046,87.837 105.04,87.837 105.05,87.847 105.065,87.862 105.55,87.862 106,88.312 106.075,88.387 106.075,89.237 106.075,93.913 106.046,93.942 105.975,94.013 105.975,94.387 105.6,94.762 105.42,94.942 105.034,94.942 97.287,94.942 97.232,94.887 96.825,94.887 96.425,94.487 96.275,94.337 96.275,94.237 96.275,90.171 96.271,90.167 82.301,90.167 82.301,94.023 82.25,94.074 82.25,94.562 82.1,94.562 81.775,94.887 81.72,94.942 81.285,94.942 73.485,94.942 73.43,94.887 73.05,94.887 72.925,94.887 72.675,94.637 72.475,94.437 72.475,94.312 72.475,93.906 72.485,93.896 72.485,88.842 72.485,88.452 72.65,88.287 72.95,87.987 72.95,87.937 73.125,87.937 73.25,87.812 73.28,87.842 73.485,87.842 74.485,87.842 74.475,87.832 74.475,87.487 78.425,87.487 78.5,87.412 78.5,79.412 74.655,79.412 74.485,79.242 74.48,79.237 73.2,79.237 73,79.237 72.7,78.937 72.485,78.722 72.485,78.237
GND on Top Layer "Top Layer-No Net" (solid, remove dead copper, pour order 12): 53.365,88.075 53.365,88.277 53.547,88.456 53.673,88.58 53.868,88.58 63.092,88.58 63.152,88.521 63.499,88.521 63.499,88.187 63.595,88.092 63.6,88.092 63.6,79.709 63.543,79.652 63.543,79.345 63.521,79.345 63.369,79.196 63.343,79.17 63.109,79.17 53.85,79.17 53.846,79.174 53.569,79.174 53.569,79.217 53.439,79.345 53.365,79.418 53.365,79.657 53.365,88.075 53.46,88.169 53.46,88.478
GND on Top Layer "Top Layer-No Net" (solid, remove dead copper, pour order 8): 72.525,78.275 79.365,78.275 79.39,78.25 80.215,79.075 80.215,79.1 93.886,79.1 94.063,78.923 94.215,78.923 94.215,78.675 94.19,78.65 94.365,78.475 106.09,78.475 106.09,78.7 105.94,78.85 105.64,79.15 105.64,79.2 104.815,79.2 104.69,79.325 104.086,79.325 104.086,79.546 104.115,79.575 104.065,79.525 100.29,79.525 100.29,87.575 100.49,87.775 100.59,87.875 104.086,87.875 105.39,87.875 105.465,87.95 105.765,88.25 105.965,88.25 105.965,88.775 106.09,88.9 106.065,88.925 106.065,89.525 106.065,94.275 106.015,94.325 105.64,94.7 105.64,94.875 105.179,94.875 105.074,94.98 104.994,94.9 97.14,94.9 96.74,94.9 96.49,94.65 96.315,94.475 96.315,94.2 96.315,93.938 96.311,93.934 96.311,90.205 82.341,90.205 82.341,94.061 82.341,94.549 82.09,94.8 81.94,94.95 81.615,94.95 73.555,94.95 73.525,94.98 73.495,94.95 72.965,94.95 72.965,94.875 72.59,94.5 72.525,94.435 72.525,93.962 72.525,88.835 72.515,88.825 72.64,88.7 72.64,88.35 72.64,88.225 72.89,87.975 72.985,87.88 73.543,87.88 74.525,87.88 74.59,87.815 74.59,87.65 78.515,87.65 78.59,87.575 78.515,87.5 78.515,79.65 74.65,79.65 74.525,79.525 74.525,79.28 73.49,79.28 73.285,79.075 72.84,79.075 72.84,78.9 72.64,78.7 72.525,78.585 72.525,78.262

## Keep-outs
Keep-Out Layer:
  lines w0.1: 63.588,79.743 cw(c63.025,79.733) 63.025,79.17 53.945,79.17 cw(c53.935,79.739) 53.366,79.739 53.365,87.99 cw(c53.945,88) 53.945,88.58 63.005,88.58 cw(c63.015,88) 63.595,88 ; 63.591,79.743 63.591,88 ; 72.485,78.237 cw(c73.485,78.255) 73.485,79.255 ; 72.485,78.25 72.485,76.955 73.155,76.955 ; 72.485,88.8 72.485,93.909 ; 72.485,88.855 ccw(c73.485,88.855) 73.503,87.855 ; 72.485,93.937 cw(c73.485,93.955) 73.485,94.955 81.285,94.955 ; 73.195,73.85 73.425,73.6 76.35,73.6 ; 73.2,73.85 73.2,76.955 ; 73.45,79.255 74.451,79.255 ; 73.485,87.855 74.485,87.855 74.485,79.255 ; 76.355,73.6 76.6,73.85 ; 76.595,76.955 77.502,76.952 79.625,79.075 93.846,79.075 94.175,78.898 94.175,76.95 ; 76.6,73.825 76.6,76.955 ; 81.283,94.955 cw(c81.301,93.955) 82.301,93.955 ; 82.301,94.036 82.301,90.18 96.271,90.18 96.271,93.909 ; 94.175,76.956 95.065,76.956 ; 95.065,76.955 95.065,73.875 95.406,73.6 102.39,73.6 102.661,73.856 102.865,74.06 102.865,76.955 106.046,76.955 106.05,78.25 ; 96.271,93.937 cw(c97.271,93.955) 97.271,94.955 ; 97.287,94.955 105.034,94.955 ; 104.046,87.85 104.046,79.255 105.125,79.255 ; 104.046,87.86 105.05,87.86 ; 105.028,79.25 cw(c105.046,78.25) 106.046,78.25 ; 105.028,94.955 cw(c105.046,93.955) 106.046,93.955 ; 105.046,87.86 ccw(c105.046,88.86) 106.046,88.878 ; 106.046,93.909 106.05,88.875

## Other copper
Top Layer:
  rectangle net 4R: 54.1,79.525 57.45,83.3
  rectangle net 38BC2: 58.45,79.6 59.975,83.3
  region net FS-D: 56.8,86.185 56.8,87.6 54.1,87.6 54.1,86.185
Bottom Layer:
  rectangle net GND: 60.95,79.375 63.225,83.05

## Silkscreen, mask and mechanical layers (free items; w line width, h text height)
Top Overlay:
  lines w0.16: 90.95,86.425 90.95,87.85 91.2,88.1 93.75,88.1 93.9,87.95 93.9,86.4 ; 91.425,88.1 91.975,88.1 ; 91.875,87.125 91.9,87.15 91.9,89.025 ; 91.975,88.1 92.925,87.15 92.925,89.05 91.975,88.1 ; 59,83.7 63.325,83.7 63.325,87.85 59,87.85 59,83.7
  lines w0.4: 54.075,82.749 55.825,82.75
  lines w0.6: 56.8,84.549 57.55,85.3 ; 57.601,81.65 57.599,85.325 58.35,84.575
  text "20190701" at 74.875,93.55 h0.8
  text "JSD" at 101.475,87.4 h0.8
  text "UP" at 56.45,86.575 h1.2
  text "FSD" at 78.4,86.2 h0.8
  text "GND" at 86.55,83.4 h1 r90
  text "OUT" at 84.275,83.35 h1 r90
  text "VCC" at 88.9,83.25 h1 r90
  text "+" at 94.7,82.2 h1.8 r90
  text "JSD" at 78.375,80.1 h0.8
  text "GND" at 100.025,78.725 h0.8 r90
  text "FSD" at 101.6,78.675 h0.8
  text "B2" at 76.95,78 h0.8
Bottom Overlay:
  lines w0.3: 73.675,78.425 74.45,79 ; 76.825,77.425 77.619,77.425 78.169,77.975 79.259,79.066
  text "SPI0701" at 104.425,92.95 h1
  text "1.6MM" at 79.875,91.775 h1.2
  text "GND" at 100.025,87.225 h1 r180
  text "4R" at 80.25,86.025 h1
  text "BC2" at 97.475,84.95 h1 r180
  text "OUT" at 84.375,83.375 h1 r90
  text "GND" at 86.675,83.375 h1 r90
  text "VCC" at 88.956,83.364 h1 r90
  text "BC2" at 78.75,83.075 h1 r180
  text "+" at 94.625,82.25 h1.8 r90
  text "BC1" at 79.625,80.2 h0.8 r180
  text "HWPOW" at 95.7,79.675 h1
  text "38OUT" at 74.725,79.65 h0.8 r180
  text "FL" at 97.9,79.05 h1 r270
  text "4R" at 103.75,78.55 h1

## Dimensions
72.485,76.955 to 106.046,76.955 on Top Overlay
102.39,73.6 to 105.034,94.955 on Top Overlay